# Altium PCB Node_Layout.PcbDoc
Units mil, origin at the board's own origin, x right, y up, seen from the top; angles counter-clockwise.
Board outline 6000 x 4000 mil, 2 copper layers (Top Layer, Bottom Layer); 103 components, 82 nets, 369 pads, 10 vias.
Unrouted connection lines stored in the file: 158.
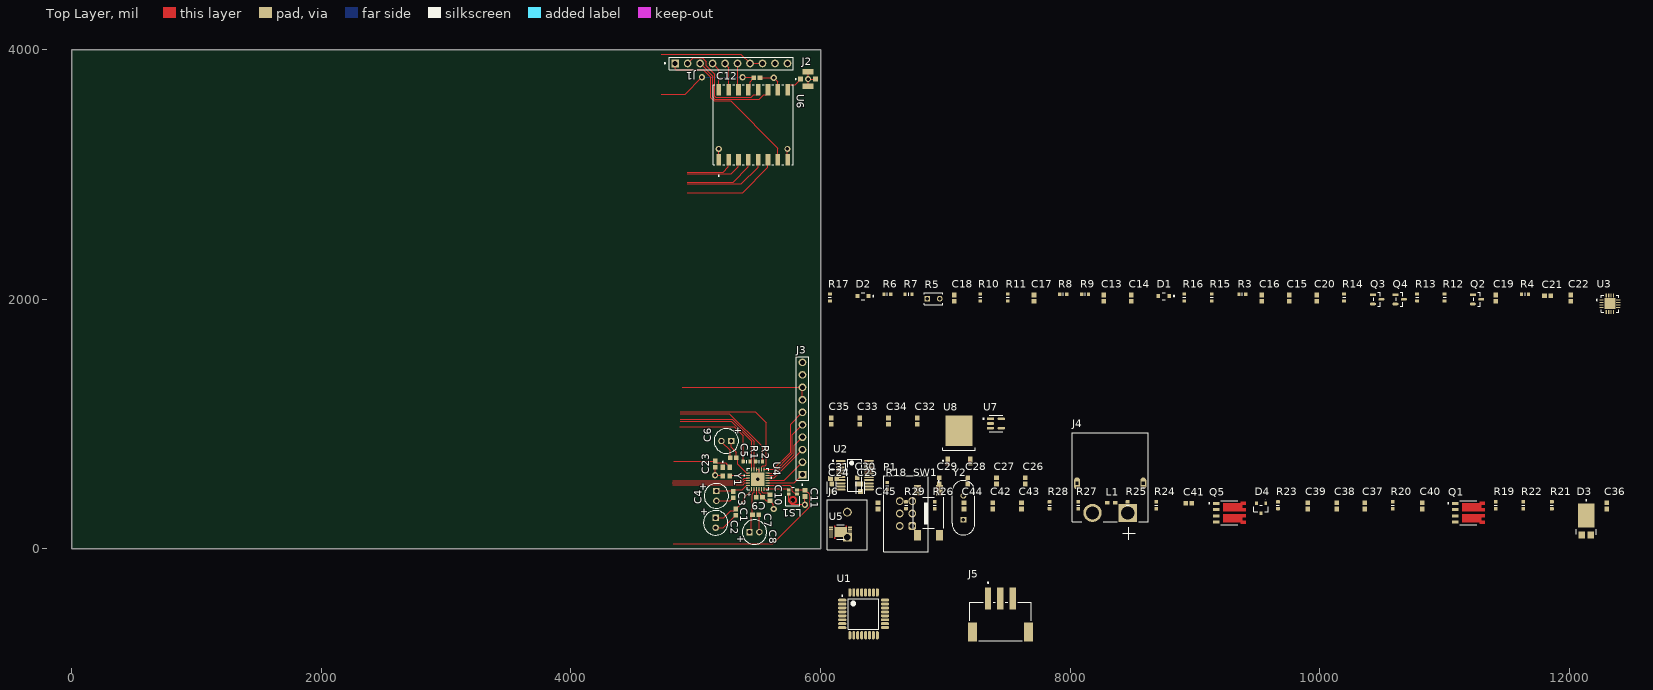
[diagram p0: Top Layer view]
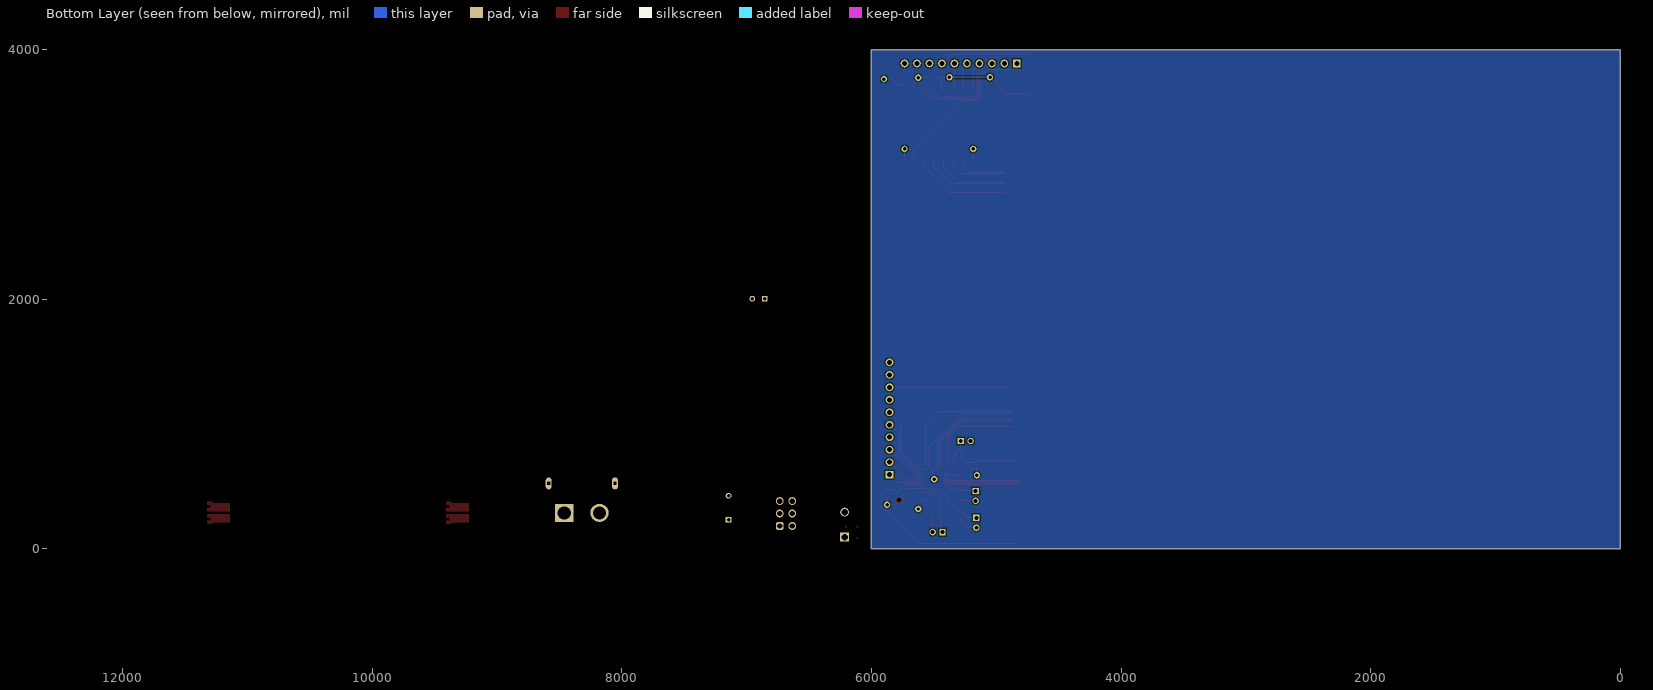
[diagram p1: Bottom Layer view, seen from below]

## Layer stack, top to bottom
Top Solder: solder mask 0.4, Solder Resist, Dk 3.5
Top Layer: signal copper 1.4
Dielectric 1: dielectric 12.6, FR-4, Dk 4.8
Bottom Layer: signal copper 1.4
Bottom Solder: solder mask 0.4, Solder Resist, Dk 3.5

## Board outline
0,0 6000,0 6000,4000 0,4000

## Design rules (kind name [scope] priority, off if disabled: settings)
Clearance [All] p1: gap=10 ignorepadtopadclearanceinfootprint=FALSE except(0: Arc-Hole Track-Hole SMDPad-Hole THPad-Hole Via-Hole Fill-Hole Poly-Hole Region-Hole Text-Hole; 5: Arc-Arc Arc-Track Track-Track SMDPad-SMDPad)
HoleSize [All] p1: absolutevalues=TRUE maxlimit=248.03 minlimit=11.81 maxpercent=80.000 minpercent=20.000
HoleToHoleClearance [All] p1: gap=19.68 allowstackedmicrovias=TRUE
PolygonConnect [All] p1: connectstyle=Relief reliefconductorwidth=10 reliefentries=4 polygonreliefangle="90 Angle" airgapwidth=10
RoutingVias [All] p1: holewidth=28 width=50 viastyle="Through Hole" minholewidth=28 minwidth=50 maxholewidth=28 maxwidth=50
SolderMaskExpansion [All] p1: expansion=4 istentingtop=FALSE
Width [All] p1: maxlimit=10 minlimit=5 preferedwidth=10 minimp=50.000000 maximp=50.000000 favimp=50.000000
28 further rules are at their usual default settings.

## Classes and differential pairs
component class Power: C13 C14 C15 C16 C17 C18 C19 C20 C21 C22 C32 C33 C34 C35 C36 C37 C38 C39 C40 C41 C42 C43 C44 C45 D1 D2 D3 D4 J4 J5 J6 L1 Q1 Q2 Q3 Q4 Q5 R3 R4 R5 R6 R7 R8 R9 R10 R11 R12 R13 R14 R15 R16 R17 R19 R20 R21 R22 R23 R24 R25 R26 R27 R28 R29 U3 U5 U7 U8
component class Mic: * C1 C2 C3 C4 C5 C6 C7 C8 C9 C10 C11 C23 J3 LS1 R1 R2 U4 Y1
component class LoRa: C12 J1 J2 U6
component class ATMEGA: C24 C25 C26 C27 C28 C29 C30 C31 P1 R18 SW1 U1 U2 Y2

## Components (designator, comment, footprint, x,y, rotation, side; value= is the part's Value field where it differs from the comment)
C1 "Capacitor 100 nF +/-10% 50 V 0603" CAPC1608X90X40NL10T20 5320,295 r270 top value=0.1uF
C2 "ECA-1HHG010" CAPPR55-200-1100X500X1200 5160,209.37 r270 top value=1µF
C3 "Capacitor 100 nF +/-10% 50 V 0603" CAPC1608X90X40NL10T20 5300,435 r270 top value=0.1uF
C4 "ECA-1HHG010" CAPPR55-200-1100X500X1200 5165,425 r270 top value=10µF
C5 "Capacitor 100 nF +/-10% 50 V 0603" CAPC1608X90X40NL10T20 5300,730 r180 top value=0.1uF
C6 "ECA-1HHG010" CAPPR55-200-1100X500X1200 5245,865 r180 top value=10µF
C7 "Capacitor 100 nF +/-10% 50 V 0603" CAPC1608X90X40NL10T20 5480,275 r0 top value=0.1uF
C8 "ECA-1HHG010" CAPPR55-200-1100X500X1200 5470,135 r0 top value=10µF
C9 "Capacitor 100 nF +/-10% 50 V 0603" CAPC1608X90X40NL10T20 5510,415 r0 top value=1uF
C10 "Capacitor 100 nF +/-10% 50 V 0603" CAPC1608X90X40NL10T20 5595,410 r270 top value=1uF
C11 "Capacitor 100 nF +/-10% 50 V 0603" CAPC1608X90X40NL10T20 5875,445 r270 top value=0.1uF
C12 "Capacitor 100 nF +/-10% 50 V 0603" CAPC1608X90X40NL10T20 5490,3775 r0 top value=10uF
C13 "Capacitor 100 nF +/-10% 50 V 0603" CAPC1608X90X40NL10T20 8270,2010 r90 top value=0.1uF
C14 "Capacitor 100 nF +/-10% 50 V 0603" CAPC1608X90X40NL10T20 8490,2010 r90 top value=0.1uF
C15 "Capacitor 100 nF +/-10% 50 V 0603" CAPC1608X90X40NL10T20 9755,2010 r90 top value=0.1uF
C16 "Capacitor 100 nF +/-10% 50 V 0603" CAPC1608X90X40NL10T20 9535,2010 r90 top value=1uF
C17 "Capacitor 100 nF +/-10% 50 V 0603" CAPC1608X90X40NL10T20 7710,2010 r90 top value=0.1uF
C18 "Capacitor 100 nF +/-10% 50 V 0603" CAPC1608X90X40NL10T20 7070,2010 r90 top value=2.2uF
C19 "Capacitor 100 nF +/-10% 50 V 0603" CAPC1608X90X40NL10T20 11410,2010 r90 top value=0.1uF
C20 "Capacitor 100 nF +/-10% 50 V 0603" CAPC1608X90X40NL10T20 9975,2010 r90 top value=0.1uF
C21 "Capacitor 100 nF +/-10% 50 V 0603" CAPC1608X90X40NL10T20 11825,2030 r0 top value=0.1uF
C22 "Capacitor 100 nF +/-10% 50 V 0603" CAPC1608X90X40NL10T20 12010,2010 r90 top value=0.1uF
C23 "Capacitor 100 nF +/-10% 50 V 0603" CAPC1608X90X40NL10T20 5155,680 r270 top value=0.1uF
C24 "C0603C220J5GACTU" FP-C0603C-CF-IPC_B 6090,490 r90 top value=22pF
C25 "C0603C220J5GACTU" FP-C0603C-CF-IPC_B 6320,490 r90 top value=22pF
C26 "Capacitor 100 nF +/-10% 50 V 0603" CAPC1608X90X40NL10T20 7640,545 r90 top value=0.1uF
C27 "Capacitor 100 nF +/-10% 50 V 0603" CAPC1608X90X40NL10T20 7410,545 r90 top value=0.1uF
C28 "Capacitor 100 nF +/-10% 50 V 0603" CAPC1608X90X40NL10T20 7180,545 r90 top value=0.1uF
C29 "Capacitor 100 nF +/-10% 50 V 0603" CAPC1608X90X40NL10T20 6950,545 r90 top value=0.1uF
C30 "Capacitor 100 nF +/-10% 50 V 0603" CAPC1608X90X40NL10T20 6295,545 r90 top value=0.1uF
C31 "Capacitor 100 nF +/-10% 50 V 0603" CAPC1608X90X40NL10T20 6105,565 r0 top value=0.1uF
C32 "Capacitor 100 nF +/-10% 50 V 0603" CAPC1608X90X40NL10T20 6775,1025 r90 top value=1uF
C33 "Capacitor 100 nF +/-10% 50 V 0603" CAPC1608X90X40NL10T20 6315,1025 r90 top value=0.33uF
C34 "Capacitor 100 nF +/-10% 50 V 0603" CAPC1608X90X40NL10T20 6545,1025 r90 top value=0.1uF
C35 "Capacitor 100 nF +/-10% 50 V 0603" CAPC1608X90X40NL10T20 6085,1025 r90 top value=1uF
C36 "Capacitor 100 nF +/-10% 50 V 0603" CAPC1608X90X40NL10T20 12300,345 r90 top value=?
C37 "Capacitor 100 nF +/-10% 50 V 0603" CAPC1608X90X40NL10T20 10360,345 r90 top value=?
C38 "Capacitor 100 nF +/-10% 50 V 0603" CAPC1608X90X40NL10T20 10135,345 r90 top value=?
C39 "Capacitor 100 nF +/-10% 50 V 0603" CAPC1608X90X40NL10T20 9905,345 r90 top value=?
C40 "Capacitor 100 nF +/-10% 50 V 0603" CAPC1608X90X40NL10T20 10820,345 r90 top value=?
C41 "Capacitor 100 nF +/-10% 50 V 0603" CAPC1608X90X40NL10T20 8950,365 r0 top value=?
C42 "Capacitor 100 nF +/-10% 50 V 0603" CAPC1608X90X40NL10T20 7380,345 r90 top value=?
C43 "Capacitor 100 nF +/-10% 50 V 0603" CAPC1608X90X40NL10T20 7610,345 r90 top value=?
C44 "Capacitor 100 nF +/-10% 50 V 0603" CAPC1608X90X40NL10T20 7150,345 r90 top value=?
C45 "Capacitor 100 nF +/-10% 50 V 0603" CAPC1608X90X40NL10T20 6460,345 r90 top value=?
D1 "MM3Z5V6C" FP-SOD-323F-MFG 8750,2025 r0 top
D2 "MM3Z5V6C" FP-SOD-323F-MFG 6340,2025 r0 top
D3 "PDS1040-13" FP-PowerDI5-MFG 12135,225 r90 top
D4 "BAT54C" NXP-SOT23-3_V 9530,325 r0 top
J1 "4-644456-0" FP-4-644456-0-MFG 5285,3890 r180 top
J2 "0734120114" MOLEX_0734120114 5900,3765 r270 top
J3 "4-644456-0" FP-4-644456-0-MFG 5855,1045 r270 top
J4 "XT60PW-M" AMASS_XT60PW-M 8320.75,525 r0 top
J5 "S3B-XH-SM4-TB(LF)(SN)" FP-S3B-XH-SM4-TB_LF_SN-MFG 7440.59,-580.35 r0 top
J6 "1729128" PHOE-1729128-2_V 6215,195 r90 top
L1 "BLM18AG121SN1D" MURA-BLM18-F-H1-CHIP-2_V 8330,370 r0 top
LS1 "SPH0641LU4H-1_L" SPH0655LM4H-1_KNO_L 5777.97,418.76 r90 top
P1 "61200621621" 61200621621 6885,-30 r90 top
Q1 "SI7288DP-T1-GE3" TRANS_SI7288DP-T1-GE3 11190,290 r0 top
Q2 "2N7002K" FP-318-08-IPC_C 11260,2000 r0 top
Q3 "2N7002K" FP-318-08-IPC_C 10460,2000 r0 top
Q4 "2N7002K" FP-318-08-IPC_C 10640,2000 r0 top
Q5 "SI7288DP-T1-GE3" TRANS_SI7288DP-T1-GE3 9275,290 r0 top
R1 "Resistor 120R +/-5 % 0603 0.1 W" RESC0603(1608)_L 5407.44,700 r180 top value=10k
R2 "Resistor 120R +/-5 % 0603 0.1 W" RESC0603(1608)_L 5507.44,700 r0 top value=10k
R3 "Resistor 120R +/-5 % 0603 0.1 W" RESC0603(1608)_L 9380,2040 r0 top value=100
R4 "Resistor 120R +/-5 % 0603 0.1 W" RESC0603(1608)_L 11645,2040 r0 top value=5
R5 "103AT-2" FP-103AT-2-MFG 6905,2005 r0 top value=10k
R6 "Resistor 120R +/-5 % 0603 0.1 W" RESC0603(1608)_L 6535,2040 r0 top value=100
R7 "Resistor 120R +/-5 % 0603 0.1 W" RESC0603(1608)_L 6705,2040 r0 top value=100
R8 "Resistor 120R +/-5 % 0603 0.1 W" RESC0603(1608)_L 7945,2040 r0 top value=100
R9 "Resistor 120R +/-5 % 0603 0.1 W" RESC0603(1608)_L 8120,2040 r0 top value=100
R10 "Resistor 120R +/-5 % 0603 0.1 W" RESC0603(1608)_L 7280,2015 r90 top value=100
R11 "Resistor 120R +/-5 % 0603 0.1 W" RESC0603(1608)_L 7500,2015 r90 top value=100
R12 "Resistor 120R +/-5 % 0603 0.1 W" RESC0603(1608)_L 11000,2015 r90 top value=10M
R13 "Resistor 120R +/-5 % 0603 0.1 W" RESC0603(1608)_L 10780,2015 r90 top value=10M
R14 "Resistor 120R +/-5 % 0603 0.1 W" RESC0603(1608)_L 10195,2015 r90 top value=10k
R15 "Resistor 120R +/-5 % 0603 0.1 W" RESC0603(1608)_L 9135,2015 r90 top value=5.1k
R16 "Resistor 120R +/-5 % 0603 0.1 W" RESC0603(1608)_L 8915,2015 r90 top value=5.1k
R17 "Resistor 120R +/-5 % 0603 0.1 W" RESC0603(1608)_L 6075,2015 r90 top value=10
R18 "Resistor 120R +/-5 % 0603 0.1 W" RESC0603(1608)_L 6535,505 r90 top value=10k
R19 "Resistor 120R +/-5 % 0603 0.1 W" RESC0603(1608)_L 11410,350 r90 top value=10k
R20 "Resistor 120R +/-5 % 0603 0.1 W" RESC0603(1608)_L 10585,350 r90 top value=10k
R21 "Resistor 120R +/-5 % 0603 0.1 W" RESC0603(1608)_L 11860,350 r90 top value=?
R22 "Resistor 120R +/-5 % 0603 0.1 W" RESC0603(1608)_L 11630,350 r90 top value=?
R23 "Resistor 120R +/-5 % 0603 0.1 W" RESC0603(1608)_L 9665,350 r90 top value=?
R24 "Resistor 120R +/-5 % 0603 0.1 W" RESC0603(1608)_L 8690,350 r90 top value=?
R25 "Resistor 120R +/-5 % 0603 0.1 W" RESC0603(1608)_L 8460,350 r90 top value=?
R26 "Resistor 120R +/-5 % 0603 0.1 W" RESC0603(1608)_L 6915,350 r90 top value=?
R27 "Resistor 120R +/-5 % 0603 0.1 W" RESC0603(1608)_L 8065,350 r90 top value=?
R28 "Resistor 120R +/-5 % 0603 0.1 W" RESC0603(1608)_L 7835,350 r90 top value=?
R29 "Resistor 120R +/-5 % 0603 0.1 W" RESC0603(1608)_L 6685,350 r90 top value=?
SW1 "FSM2JSMAA" FP-FSM2JSMAA-MFG 6865,290 r0 top
U1 "ATMEGA328P-AU" ATML-32A_M 6345,-520 r0 top
U2 "TXS0108EPWR" FP-PW0020A-IPC_A 6275,590 r0 top
U3 "BQ24650RVAT" FP-RVA0016A-IPC_B 12325,1965 r0 top
U4 "PCMD3180IRTWR" QFN_0IRTWR_TEX 5497.5,559.22 r90 top
U5 "BQ28Z620DRZR_L" VSON12_DRZ_TEX_L 6160,135 r0 top
U6 "RFM95W-915S2" IC16_RFM95W-915S2_RFS 5460.63,3398.5 r90 top
U7 "LP5907MFX-3.3/NOPB" FP-DBV0005A-IPC_B 7405,1005 r0 top
U8 "L7805CDT-TR" TO-252_L 7110,870 r90 top
Y1 "ECS-2033-120-BN" OSC_ECS-2033-120-BN 5245,620 r270 top
Y2 "HC-49US 16.000MHZ" JPY-HC-49US 7145,330 r90 top

## Footprints (in the part's own frame and the unit in brackets; to place one, negate y for a bottom-side part, rotate by r counter-clockwise, add the part's x,y. Pads: shape width x height; smd on the part's side, far side on the other; paste and mask are expansions set on the pad)
61200621621 [mm] "6 pins, straight, gold plating"
  rrect50% 1.6x1.6 hole 1.1: 1(5.425,3.81)
  round 1.6 hole 1.1: 2(5.425,6.35) 3(7.965,3.81) 4(7.965,6.35) 5(10.505,3.81) 6(10.505,6.35)
  silkscreen extent 0.23,0.58 15.71,9.58, body extent 0.33,0.65 15.6,9.83, height 9.13
AMASS_XT60PW-M [mm]
  rect 3.716x3.716 / inner round 3.716 / far side rect 3.716x3.716 hole 2.7: 1(3.6,-6)
  round 3.716 hole 2.7: 2(-3.6,-6)
  oval 1.2x2.4 hole 0.6 square: S1(6.75,0) S2(-6.75,0)
  silkscreen extent -7.75,-11.43 7.75,10.35, body extent -7.75,-7.85 7.75,10.35, height 8.4
ATML-32A_M [mm] "TQFP, 32-Leads, Body 7x7mm, Pitch 0.8mm, IPC Low Density"
  oval 1.7x0.6 smd: 1(-4.35,2.8) 2(-4.35,2) 3(-4.35,1.2) 4(-4.35,0.4) 5(-4.35,-0.4) 6(-4.35,-1.2) 7(-4.35,-2) 8(-4.35,-2.8) 17(4.35,-2.8) 18(4.35,-2) 19(4.35,-1.2) 20(4.35,-0.4) 21(4.35,0.4) 22(4.35,1.2) 23(4.35,2) 24(4.35,2.8)
  oval 0.6x1.7 smd: 9(-2.8,-4.35) 10(-2,-4.35) 11(-1.2,-4.35) 12(-0.4,-4.35) 13(0.4,-4.35) 14(1.2,-4.35) 15(2,-4.35) 16(2.8,-4.35) 25(2.8,4.35) 26(2,4.35) 27(1.2,4.35) 28(0.4,4.35) 29(-0.4,4.35) 30(-1.2,4.35) 31(-2,4.35) 32(-2.8,4.35)
  silkscreen extent -4.47,-3.1 3.1,3.77, body extent -4.5,-4.5 4.5,4.5, height 1.2
CAPC1608X90X40NL10T20 [mm] "Chip Capacitor, 2-Leads, Body 1.70x0.90mm, IPC Medium Density"
  rect 0.95x0.95 smd: 1(-0.625,0) 2(0.625,0)
  body extent -0.85,-0.45 0.85,0.45, height 0.9
CAPPR55-200-1100X500X1200 [mm] "THD, 2-Leads, Dia 5mm, Pin Spacing 2mm"
  rect 1.3x1.3 hole 0.8: 1(-1,0)
  round 1.3 hole 0.8: 2(1,0)
  silkscreen extent -2.5,-2.5 2.5,2.5, body extent -2.5,-2.5 2.45,2.5, height 12
FP-4-644456-0-MFG [mil]
  rect 61.65x61.65 hole 40 paste-99999 mask+0: 1(450,0)
  round 61.65 hole 40 paste-99999 mask+0: 2(350,0) 3(250,0) 4(150,0) 5(50,0) 6(-50,0) 7(-150,0) 8(-250,0) 9(-350,0) 10(-450,0)
  silkscreen extent -497,-49 537,49, body extent -500,-52 500,52, height 10
FP-103AT-2-MFG [mm]
  rect 1.15x1.15 hole 0.65 paste-2539.97 mask+0: 1(-1.27,0)
  round 1.15 hole 0.65 paste-2539.97 mask+0: 2(1.27,0)
  silkscreen extent -1.85,-1.2 1.85,1.2, body extent -1.95,-1.3 1.95,1.3, height 0.25
FP-318-08-IPC_C [mm]
  rect 1.224x0.538 smd paste+0 mask+0: 1(-0.86,0.95)
  rrect100% 1.224x0.538 smd paste+0 mask+0: 2(-0.86,-0.95) 3(0.86,0)
  silkscreen extent -0.65,-1.45 0.65,1.45, body extent -1.57,-1.55 1.57,1.55, height 0.25
FP-C0603C-CF-IPC_B [mil]
  rect 39.63x37.73 smd paste+0 mask+0: 1(-28.58,0) 2(28.58,0)
  silkscreen extent -48,-35 48,35, body extent -58,-29 58,29, height 10
FP-DBV0005A-IPC_B [mm]
  rect 1.505x0.572 smd paste+0 mask+0: 1(-1.1,0.95)
  rrect100% 1.505x0.572 smd paste+0 mask+0: 2(-1.1,0) 3(-1.1,-0.95) 4(1.1,-0.95) 5(1.1,0.95)
  silkscreen extent -2.65,-1.7 1.4,1.7, body extent -2.1,-1.7 2.1,1.7, height 0.25
FP-FSM2JSMAA-MFG [mm]
  rect 1.38x2.1 smd paste+0 mask+0: 1(2.25,4.55) 2(2.24,-4.55) 3(-2.24,4.55) 4(-2.24,-4.55)
  silkscreen extent -3.15,-3.15 3.15,6.5, body extent -3.25,-5.7 3.25,5.7, height 0.25
FP-PowerDI5-MFG [mm]
  rect 1.4x1.39 smd paste+0 mask+0: 1(-2.862,0.923) 3(-2.862,-0.917)
  rect 4.86x3.36 smd paste+0 mask+0: 2(1.12,0)
  silkscreen extent -2.73,-2.02 4.3,2.02, body extent -3.66,-2.12 3.65,2.12, height 0.25
FP-PW0020A-IPC_A [mm]
  rect 1.955x0.421 smd paste+0 mask+0: 1(-2.875,2.925)
  rrect100% 1.955x0.421 smd paste+0 mask+0: 2(-2.875,2.275) 3(-2.875,1.625) 4(-2.875,0.975) 5(-2.875,0.325) 6(-2.875,-0.325) 7(-2.875,-0.975) 8(-2.875,-1.625) 9(-2.875,-2.275) 10(-2.875,-2.925) 11(2.875,-2.925) 12(2.875,-2.275) 13(2.875,-1.625) 14(2.875,-0.975) 15(2.875,-0.325) 16(2.875,0.325) 17(2.875,0.975) 18(2.875,1.625) 19(2.875,2.275) 20(2.875,2.925)
  silkscreen extent -4.55,-3.25 1.4,3.25, body extent -4.35,-3.75 4.35,3.75, height 0.25
FP-RVA0016A-IPC_B [mm]
  rect 0.836x0.239 smd paste+0 mask+0: 1(-1.688,0.75)
  rrect100% 0.836x0.239 smd paste+0 mask+0: 2(-1.688,0.25) 3(-1.688,-0.25) 4(-1.688,-0.75) 9(1.688,-0.75) 10(1.688,-0.25) 11(1.688,0.25) 12(1.688,0.75)
  rrect100% 0.239x0.836 smd paste+0 mask+0: 5(-0.75,-1.688) 6(-0.25,-1.688) 7(0.25,-1.688) 8(0.75,-1.688) 13(0.75,1.688) 14(0.25,1.688) 15(-0.25,1.688) 16(-0.75,1.688)
  rect 2.24x2.24 smd paste-1000 mask+0: 17(0,0)
  silkscreen extent -2.78,-1.75 1.75,1.75, body extent -2.36,-2.36 2.36,2.36, height 0.25
FP-S3B-XH-SM4-TB_LF_SN-MFG [mm]
  rect 1.3x4.5 smd paste+0 mask+0: 1(-2.5,4.65) 2(0,4.65) 3(2.5,4.65)
  rect 1.8x3.9 smd paste+0 mask+0: 4(-5.7,-2.15) 5(5.7,-2.15)
  silkscreen extent -6.25,-3.9 6.25,8, body extent -6.7,-4.2 6.7,7, height 0.25
FP-SOD-323F-MFG [mm]
  rect 0.8x0.8 smd paste+0 mask+0: 1(-1.125,0) 2(1.125,0)
  silkscreen extent -0.35,-0.72 2.23,0.72, body extent -1.63,-0.82 1.63,0.82, height 0.25
IC16_RFM95W-915S2_RFS [mil]
  rect 91x37 smd paste+0 mask+0: 1(-281.5,275.59) 2(-281.5,196.85) 3(-281.5,118.11) 4(-281.5,39.37) 5(-281.5,-39.37) 6(-281.5,-118.11) 7(-281.5,-196.85) 8(-281.5,-275.59) 9(281.5,-275.59) 10(281.5,-196.85) 11(281.5,-118.11) 12(281.5,-39.37) 13(281.5,39.37) 14(281.5,118.11) 15(281.5,196.85) 16(281.5,275.59)
  silkscreen extent -412,-320 320,320, body extent -315,-315 315,315, height 71
JPY-HC-49US [mm] "THD, 2-Leads, Body 11.05x4.65mm, Pitch 4.9mm"
  rect 1.2x1.2 hole 0.7: 1(-2.45,0)
  round 1.2 hole 0.7: 2(2.45,0)
  silkscreen extent -5.53,-2.32 5.53,2.32, body extent -5.53,-2.33 5.52,2.32, height 3.5
MOLEX_0734120114 [mm]
  rect 1x1 smd: 1(0,-1.5) 3(0,1.5)
  rect 1.05x2.2 smd: 2(-1.475,0) 4(1.475,0)
  silkscreen extent -0.1,-2.6 0.1,-2.4
MURA-BLM18-F-H1-CHIP-2_V [mm] "Chip Ferrite Bead, 2-Leads, Body 1.6x0.8mm, Height 0.95mm, Flow"
  rect 0.95x0.7 smd: 1(-0.825,0) 2(0.825,0)
  body extent -0.87,-0.48 0.87,0.48, height 0.95
NXP-SOT23-3_V [mm] "SOT23, 3-Leads, Body 1.3x2.9mm, Pitch 0.95mm"
  rect 0.6x0.7 smd paste-0.05: 1(0.95,1) 2(-0.95,1) 3(0,-1)
  silkscreen extent -1.45,-0.65 1.45,1.79, body extent -1.45,-0.65 1.45,0.65, height 1.1
OSC_ECS-2033-120-BN [mm]
  rect 1.1x0.9 smd: 1(-0.9,-0.7) 2(0.9,-0.7) 3(0.9,0.7) 4(-0.9,0.7)
  silkscreen extent -2.08,-0.8 -1.88,-0.6
PHOE-1729128-2_V [mm] "Receptacle, 2-Leads, Body 8.1x10.16mm, Pitch 5.08mm"
  rect 1.8x1.8 hole 1.3: 1(-2.54,0)
  round 1.8 hole 1.3: 2(2.54,0)
  silkscreen extent -5.08,-4.05 5.08,4.05, body extent -5.65,-4.05 5.08,4.05, height 10.01
QFN_0IRTWR_TEX [mil]
  rect 32x8 smd paste+0 mask+0: 1(-77.5,49.23) 2(-77.5,29.53) 3(-77.5,9.85) 4(-77.5,-9.85) 5(-77.5,-29.53) 6(-77.5,-49.23) 13(77.5,-49.23) 14(77.5,-29.53) 15(77.5,-9.85) 16(77.5,9.85) 17(77.5,29.53) 18(77.5,49.23)
  rect 8x32 smd paste+0 mask+0: 7(-49.22,-77.5) 8(-29.53,-77.5) 9(-9.84,-77.5) 10(9.85,-77.5) 11(29.54,-77.5) 12(49.23,-77.5) 19(49.23,77.5) 20(29.54,77.5) 21(9.85,77.5) 22(-9.84,77.5) 23(-29.53,77.5) 24(-49.22,77.5)
  rect 110x110 smd paste-54.5 mask+0: 25(0,0)
  silkscreen extent -86,-114 86,114, body extent -81,-81 81,81, height 32
RESC0603(1608)_L [mm] "Chip Resistor, Body 1.6x0.8mm, IPC High Density"
  rrect25% 0.66x0.76 smd: 1(-0.7,0) 2(0.7,0)
  silkscreen extent 0,-0.3 0,0.3, body extent -0.8,-0.4 0.8,0.4, height 0.45
SPH0655LM4H-1_KNO_L [mil]
  rect 21x29 smd paste-14.5 mask-14.5: 1(53.6,32.97) 2(21.24,32.97) 4(21.24,-32.97) 5(53.6,-32.97)
  rect 2x2 smd paste-1 mask-1: 3(-54.06,0)
  round 32 / inner round 60 / far side round 32 hole 32 unplated paste-99999 mask-16: 6(-28.06,0)
  Top Layer region: -8.13,-1.74 3.82,-2.79 3.94,0 2.38,9.89 -2.17,18.81 -9.25,25.89 -18.17,30.43 -28.06,32 -37.94,30.43 -46.86,25.89 -53.94,18.81 -58.49,9.89 -60.06,0 -59.93,-2.79 -47.98,-1.74 -48.06,0 -47.08,6.18 -44.24,11.76 -39.81,16.18 -34.24,19.02 -28.06,20 -21.87,19.02 -16.3,16.18 -11.87,11.76 -9.03,6.18 -8.06,0
  Top Layer region: -8.13,1.74 3.82,2.79 3.94,0 2.38,-9.89 -2.17,-18.81 -9.25,-25.89 -18.17,-30.43 -28.06,-32 -37.94,-30.43 -46.86,-25.89 -53.94,-18.81 -58.49,-9.89 -60.06,0 -59.93,2.79 -47.98,1.74 -48.06,0 -47.08,-6.18 -44.24,-11.76 -39.81,-16.18 -34.24,-19.02 -28.06,-20 -21.87,-19.02 -16.3,-16.18 -11.87,-11.76 -9.03,-6.18 -8.06,0
  silkscreen extent -74,-57 74,57
TO-252_L [mm] "D-PAK, 4-Leads, Body 6.1x6.5mm, Pitch 2.28mm, Lead Span 9.7mm, IPC High Density"
  rect 1.8x0.9 smd: 1(-4.2,2.28) 3(-4.2,-2.28)
  rect 6.2x5.45 smd: 4(2,0)
  silkscreen extent -4.32,-3.3 -1.5,3.4, body extent -2.05,-3.3 4.15,3.3, height 2.4
TRANS_SI7288DP-T1-GE3 [mm]
  rect 1.27x0.61 smd: 1(-2.67,1.905) 2(-2.67,0.635) 3(-2.67,-0.635) 4(-2.67,-1.905)
  rect 0.1x0.1 smd paste-1 mask+0: 5_6_10(0.5,-1.1) 7_8_9(0.5,1.1)
  Top Layer region: 2.6,-0.33 3.305,-0.33 3.305,-0.94 2.6,-0.94 2.6,-1.6 3.305,-1.6 3.305,-2.21 2.285,-2.21 2.285,-1.955 -1.215,-1.955 -1.215,-0.305 2.6,-0.305
  Top Layer region: 3.305,1.6 2.6,1.6 2.6,0.94 3.305,0.94 3.305,0.33 2.6,0.33 2.6,0.305 -1.215,0.305 -1.215,1.955 2.285,1.955 2.285,2.21 3.305,2.21
  silkscreen extent -4.17,-2.45 1.72,2.45, body extent -3.07,-2.58 3.07,2.58, height 1.12
VSON12_DRZ_TEX_L [mil]
  rect 32x10 smd paste+0 mask+0: 1(-77.5,39.37) 2(-77.5,23.62) 3(-77.5,7.87) 4(-77.5,-7.87) 5(-77.5,-23.62) 6(-77.5,-39.37) 7(77.5,-39.37) 8(77.5,-23.62) 9(77.5,-7.87) 10(77.5,7.87) 11(77.5,23.62) 12(77.5,39.37)
  rect 100x81 smd paste+0 mask+0: 13(0,0)
  Top Layer region: 42,-40.5 50,-40.5 50,-52.5 42,-52.5
  Top Layer region: -42,-40.5 -50,-40.5 -50,-52.5 -42,-52.5
  Top Layer region: 42,40.5 50,40.5 50,52.5 42,52.5
  Top Layer region: -42,40.5 -50,40.5 -50,52.5 -42,52.5
  silkscreen extent -30,-57 30,57, body extent -81,-53 81,53, height 32

## Part data
C1 C3 C5 C7 C9 C10 C11 C12 C13 C14 C15 C16 C17 C18 C19 C20 C21 C22 C23 C26 C27 C28 C29 C30 C31 C32 C33 C34 C35 C36 C37 C38 C39 C40 C41 C42 C43 C44 C45: library part CMP-001-00017-6, "Chip Capacitor, 100 nF, +/- 10%, 50 V, 0603 (1608 Metric)", Capacitor Type=Ceramic, Case/Package=0603, Max Operating Temperature=125°C, Min Operating Temperature=-55°C, Tolerance=10%, Voltage Rating=50V, Mounting Technology=SM, Pins=2, RoHS Compliant=True
C2 C4 C6 C8: library part CMP-001-00024-7, "Aluminum Electrolytic Capacitor, 1 uF, +/- 20%, 50 V, -55 to 105 degC, 2-Pin THD, RoHS, Bulk", Capacitor Type=Electrolytic, Case/Package=Radial, Manufacturer=Panasonic, Max Operating Temperature=105°C, Min Operating Temperature=-55°C, Package Description="2-Pin Radial Lead, Dia 5 mm, Height 12 mm", Package Quantity=200, Package Reference=CAPPR55-200-1100X500X1200, Ripple Current=10mA, Tolerance=20%, Voltage Rating=50V, Datasheet URL=https://datasheet.ciiva.com/7275/94060-7275472.pdf, Datasheet Version=Mar-05, Diameter=5mm, Lead Pitch=2mm, Manufacturer URL=http://www.panasonic.com/, Mounting Technology=TH, Packaging=Bulk, Pins=2, Ripple Current (AC)=10mA, RoHS Compliant=True
C24 C25: library part CMP-001-00083-1, "Ceramic Capacitor, Multilayer, Ceramic, 50V, 5% +Tol, 5% -Tol, C0G, 30ppm/Cel TC, 0.000022uF, Surface Mount, 0603", Capacitor Type=Ceramic, Case/Package=0603, Max Operating Temperature=125°C, Min Operating Temperature=-55°C, Mounting Technology="Surface Mount", Pins=2, RoHS Compliant=Yes
D1 D2: library part CMP-004-00031-1, "Zener Diode, 5.6V V(Z), 5%, 0.2W, Silicon, Unidirectional", Max Operating Temperature=150°C, Pins=2, RoHS Compliant=Yes
D3: library part CMP-004-00033-1, "Rectifier Diode, Schottky, 1 Phase, 1 Element, 10A, 40V V(RRM), Silicon", Forward Voltage=410mV, Max Operating Temperature=180°C, Min Operating Temperature=-65°C, Pins=3, RoHS Compliant=Yes
D4: library part CMP-004-00032-1, "Rectifier Diode, Schottky, 2 Element, 0.2A, 30V V(RRM), Silicon, TO-236AB", Forward Voltage=1V, Max Operating Temperature=150°C, Min Operating Temperature=-55°C, Pins=3, RoHS Compliant=Yes
J1 J3: library part CMP-002-00072-1, "Board Connector, 10 Contact(s), 1 Row(s), Male, Straight, 0.1 inch Pitch, Solder Terminal, Natural Insulator, Plug", Max Operating Temperature=105°C, Min Operating Temperature=-55°C, Connector Type="BOARD CONNECTOR", Mounting Technology=Board, RoHS Compliant=Yes
J2: library part CMP-003-000000-1, "U.FL (UMCC) Connector Receptacle, Male Pin 50Ohm Surface Mount Solder", Package=None, Availability=Unavailable, Component Type=Standard, Design Item ID=0734120114, MF=Molex, MP=0734120114, Pin Count=4, Price=None, SnapEDA_Link=https://www.snapeda.com/parts/0734120114/Molex/view-part/557843/?ref=snap, Source=0734120114.SchLib
J4: library part CMP-002-00073-1, "Socket, DC supply, male, PIN: 2", Case/Package=Package, Availability="Not in stock", Check_prices=https://www.snapeda.com/parts/XT60PW-M/AMASS/view-part/?ref=eda, Component Type=Standard, Design Item ID=XT60PW-M, MF=AMASS, MP=XT60PW-M, Pins=2, Price=None, SnapEDA_Link=https://www.snapeda.com/parts/XT60PW-M/AMASS/view-part/?ref=snap, Source=XT60PW-M.SchLib
J5: library part CMP-002-00074-1, "Conn Shrouded Header HDR 3 POS 2.5mm Solder RA Side Entry SMD T/R"
J6: library part CMP-002-00076-1, "Barrier Strip Terminal Block, 13.5A, 1.5mm2, 1 Row(s), 1 Deck(s)", Voltage Rating=400V, Mounting Technology=Board, RoHS Compliant=Yes
L1: library part CMP-006-00004-3, "Chip Ferrite Bead for General Use, 120 Ohm, 500 mA, -55 to 125 degC, 0603 (1608 Metric), RoHS, Tape and Reel", Case/Package=0603, Current Rating=500mA, Manufacturer=Murata, Max Operating Temperature=125°C, Min Operating Temperature=-55°C, Package Quantity=4000, Package Reference=BLM18_H950-2, Resistance=200mohm, Tolerance=25%, Core Material=Ferrite, Datasheet URL=https://statics3.seeedstudio.com/images/opl/datasheet/303010016.pdf, Datasheet Version=Jun-12, Impedance=120Ohm, Max Current Rating=500mA, Packaging=TapeandReel, RoHS Compliant=True
LS1: library part CMP-00027-00004-1, "No Description Available", Manufacturer_Part_Number=SPH0641LU4H-1, Mfr_Name=Knowles, Copyright="Copyright (C) 2023 Ultra Librarian. All rights reserved.", Design Item ID=SPH0641LU4H-1_L, RefDes=RefDes, Source=SPH0641LU4H-1_L.SchLib, Type=DEV
P1: library part CMP-002-00075-1, "Board Connector, 6 Contact(s), 2 Row(s), Male, Straight, Solder Terminal", Connector Type="BOARD CONNECTOR", Mounting Technology=Board, RoHS Compliant=Yes
Q1 Q5: library part CMP-027-000000-1, "Mosfet Array 2 N-Channel (Dual) 40V 20A 15.6W Surface Mount PowerPAKÂ® SO-8 Dual", Package="SO-8 Vishay", Check_prices=https://www.snapeda.com/parts/SI7288DP-T1-GE3/Vishay+Siliconix/view-part/?ref=eda, Component Type=Standard, Design Item ID=SI7288DP-T1-GE3, Digi-Key_Part_Number=SI7288DP-T1-GE3TR-ND, MF=Vishay, MP=SI7288DP-T1-GE3, Pin Count=6, Purchase-URL=https://pricing.snapeda.com/search/part/SI7288DP-T1-GE3/?ref=eda, SnapEDA_Link=https://www.snapeda.com/parts/SI7288DP-T1-GE3/Vishay+Siliconix/view-part/?ref=snap, Source=SI7288DP-T1-GE3.SchLib
Q2 Q3 Q4: library part CMP-013-00035-1, "Small Signal Field-Effect Transistor, 0.115A I(D), 60V, 1-Element, N-Channel, Silicon, Metal-oxide Semiconductor FET, TO-236AB", RoHS Compliant=No
R1 R2 R3 R4 R6 R7 R8 R9 R10 R11 R12 R13 R14 R15 R16 R17 R18 R19 R20 R21 R22 R23 R24 R25 R26 R27 R28 R29: library part CMP-009-00176-3, "Chip Resistor, 120 Ohms, +/-5 %, 0.1 W, -55 to 155 degC, 0603", Case/Package=0603, Max Operating Temperature=155°C, Min Operating Temperature=-55°C, Power=100mW, Tolerance=5%, Pins=2
R5: library part CMP-009-00177-1, "NTC Thermistor, 10000ohm, Through Hole Mount", Max Operating Temperature=110°C, Min Operating Temperature=-50°C, Power=10mW, Tolerance=1%, Mounting Technology="Through Hole", Pins=2, RoHS Compliant=Yes
SW1: library part CMP-011-00013-1, "Keypad Switch, 1 Switches, SPST, Momentary-tactile, 0.05A, 24VDC, 3.04N, Solder Terminal, Surface Mount-straight", Max Operating Temperature=85°C, Min Operating Temperature=-20°C, Mounting Technology="Surface Mount", RoHS Compliant=Yes
U1: library part CMP-020-00003-3, "8-Bit Microcontroller with 32 KBytes In-System Programmable Flash, 23 I/Os, -40 to 85 degC, 32-Pin TQFP (32A), RoHS, Tray", Case/Package=TQFP, Clock Frequency=20MHz, Manufacturer=Atmel, Max Operating Temperature=85°C, Max Supply Voltage=5.5V, Min Operating Temperature=-40°C, Min Supply Voltage=1.8V, Package Description="32-Pin Thin Profile Plastic Quad Flat Package, Body 7 x 7 mm, Pitch 0.8 mm", Package Quantity=250, Package Reference=32A, ADC Channels=8, Datasheet URL=http://www.atmel.com/images/Atmel-8271-8-bit-AVR-Microcontroller-ATmega48A-48PA-88A-88PA-168A-168PA-328-328P_datasheet_Complete.pdf, Datasheet Version="Rev. 8271J, 11/2015", Density=32KB, Ethernet Channels=0, Frequency=20MHz, I/Os=23, Interface=USART, Manufacturer URL=http://www.atmel.com/, Max Clock Frequency=20MHz, Mounting Technology=SM, Packaging=Tray, Pins=32, PWM Channels=6, RAM Size=2KB, RoHS Compliant=True, USB Channels=0
U2: library part CMP-019-00054-1, "Interface Circuit, PDSO20", Case/Package=TSSOP, Max Operating Temperature=85°C, Max Supply Voltage=3.6V, Min Operating Temperature=-40°C, Min Supply Voltage=1.2V, Pins=20, RoHS Compliant=Yes
U3: library part CMP-019-00049-1, "Power Supply Support Circuit, Adjustable, 1 Channel, +3.85V, PQCC16", Case/Package=HVQCCN, Max Operating Temperature=85°C, Max Supply Voltage=28V, Min Operating Temperature=-40°C, Min Supply Voltage=5V, Pins=16, RoHS Compliant=Yes
U4: library part CMP-011-000000-1, "No Description Available", Mfr_Name="Texas Instruments", Copyright="Copyright (C) 2023 Ultra Librarian. All rights reserved.", Design Item ID=PCMD3180IRTWR, Manufacturer_Part_Number=PCMD3180IRTWR, RefDes=RefDes, Source=PCMD3180IRTWR.SchLib, Type=DEV
U5: library part CMP-00029-00001-1, "No Description Available", Manufacturer_Part_Number=BQ28Z620DRZR, Mfr_Name="Texas Instruments", Copyright="Copyright (C) 2023 Ultra Librarian. All rights reserved.", Design Item ID=BQ28Z620DRZR_L, RefDes=RefDes, Source=BQ28Z620DRZR.SchLib, Type=DEV
U6: library part CMP-00025-00004-1, "No Description Available", Mfr_Name="RF Solutions", Copyright="Copyright (C) 2023 Ultra Librarian. All rights reserved.", Design Item ID=RFM95W-915S2, Manufacturer_Part_Number=RFM95W-915S2, RefDes=RefDes, Source=RFM95W-915S2.SchLib, Type=DEV
U7: library part CMP-019-00051-1, "Fixed Positive LDO Regulator, 3.3V, 0.25V Dropout, PDSO5", Case/Package=LSSOP, Max Supply Voltage=5.5V, Pins=5, RoHS Compliant=Yes
U8: library part CMP-019-00050-1, "Fixed Positive Standard Regulator, 5VBIPolar, PSSO2", Max Supply Voltage=25V, Pins=2, RoHS Compliant=Yes
Y1: library part CMP-023-000000-1, "12MHz XO (Standard) CMOS Oscillator 3.3V Enable/Disable 4-SMD, No Lead", Package="SMD-4 ECS International", Arrow_Electronics-Purchase-URL=https://snapeda.com/shop?store=Arrow+Electronics&id=2724744, Availability=Good, Component Type=Standard, Design Item ID=ECS-2033-120-BN, DigiKey-Purchase-URL=https://snapeda.com/shop?store=DigiKey&id=2724744, MF="ECS Inc.", Mouser-Purchase-URL=https://snapeda.com/shop?store=Mouser&id=2724744, MP=ECS-2033-120-BN, Pin Count=4, Price=None, SnapEDA_Link=https://www.snapeda.com/parts/ECS-2033-120-BN/ECS%20Inc./view-part/2724744/?ref=snap, Source=ECS-2033-120-BN.SchLib
Y2: library part CMP-003-00005-2, "Crystal, 16 MHz, +/- 30 ppm, 18 pF, -20 to 70 degC, 2-Pin THD", Case/Package=HC-49US, Frequency=16MHz, Manufacturer="Jing peng yuan", Package Description="2-Pin Throug Hole Device, Body 11.05 x 4.65 mm, Pitch 4.9 mm", Datasheet URL=https://statics3.seeedstudio.com/images/opl/datasheet/306010014.pdf, Datasheet Version=May-15, Mounting Technology=TH, Package Reference=HC-49US, RoHS Compliant=Unknown

## Via types
v1: diameter 50, hole 28, Top Layer to Bottom Layer, 10 vias

## Nets (pads, with @x,y where several pads share a name; then routed paths per layer and width w, separated by ;. In a path a pad name is that pad's centre, name@x,y a point inside that pad or via, vN(x,y) a via of type N, cw(c..) or ccw(c..) an arc to the next point about the centre after c; other vN are vias at no path point)
+5: C27.1 C28.1 C29.1 C31.1 C32.1 C34.1 P1.2 R18.1 U1.4 U1.6 U1.18 U2.19 U7.1 U7.3 U8.3
ATMEGA_MISO: P1.1 U1.16
ATMEGA_MOSI: P1.4 U1.15
ATMEGA_RST: P1.5 R18.2 SW1.3 SW1.4 U1.29
ATMEGA_SCK: P1.3 U1.17
ATMEGA_XTAL1: U1.7 Y2.1
ATMEGA_XTAL2: U1.8 Y2.2
Batt+: C19.2 C33.1 C42.1 C43.1 C44.1 C45.2 R17.2 R27.1 R28.2 U3.9 U8.1
Batt-: C1.2 C2.2 C3.2 C4.2 C5.2 C6.2 C7.2 C8.2 C9.2 C10.2 C11.2 C12.2 C13.2 C14.2 C15.1 C18.1 C20.1 C23.2 C24.2 C25.2 C26.2 C27.2 C28.2 C29.2 C30.2 C31.2 C32.2 C33.2 C34.2 C35.2 C36.2 C37.2 C38.2 C39.2 C40.2 C42.2 C43.2 D1.2 D2.2 J1.9 J1.10 J2.2 J2.3 J2.4 J3.9 J3.10 J5.5 J6.2 LS1.2 LS1.3 P1.6 Q5.1 R5.1 R6.2 R7.2 R14.2 R24.1 R26.1 R29.1 SW1.1 SW1.2 U1.3 U1.5 U1.21 U2.11 U3.11 U3.17 U4.4 U4.15 U4.16 U4.25 U5.1 U6.1 U6.8 U6.10 U7.2 U8.4 Y1.2 | length 1967.1
  Top Layer w10: C23.2 v1(5155,590) 5212.01,590 Y1.2 ; C2.2 5160.98,170.98 5220.59,170.98 C1.2 ; C4.2 5275.24,385.63 C3.2 ; v1(5185,3205) U6.1 U6.1 ; C6.2 5205.63,859.37 5275.39,789.61 C5.2 ; U4.16 U4.15 5507.35,569.07 v1(5497.5,559.22) U4.25@5507.35,549.38 ; C7.2 5509.37,270.24 C8.2 ; U4.4 5508.03,481.04 5508.03,450.97 5520.91,438.1 5520.91,428.7 C9.2 5564.21,385.39 C10.2 5622.84,357.55 5622.84,322.16 v1(5625,320) ; C12.2 5517.11,3772.5 5519.61,3775 v1@5626.32,3775 ; v1(5625,3775) v1@5626.32,3775 ; U6.10 5657.48,3743.84 v1@5626.32,3775 ; v1(5735,3205) 5735,3118.22 U6.8 ; LS1.2 5745,379.84 5765.13,359.71 5870.29,359.71 v1(5875,355) C11.2 ; J2.4 v1(5900,3765) ; J2.2 v1(5900,3765) ; J2.3 v1(5900,3765)
Batt_Cell1: R3.1
Batt_Cell2: C22.2 Q4.2 R4.1 R13.1
BMS_SCL: R9.2
BMS_SDA: R11.2
BMS_VC1: U5.12
BMS_VC2: C16.1 R4.2 U5.11
BQ2_CHG: R16.2 U5.9
BQ2_DSG: R15.2 U5.7
BQ2_SCL: R8.1 U5.5
BQ2_SDA: R10.1 U5.6
BQ2_TS1: R5.2 U5.4
LoRa_Antenna: J2.1 U6.9 | length 155.7
  Top Layer w10: U6.9 5736.22,3707 5749.72,3720.5 5796.44,3720.5 J2.1
LoRa_MISO: U6.2 | length 405.1
  Top Layer w10: 4930,3020 5220,3020 5262.36,3062.36 5262.36,3115.58 U6.2
LoRa_MOSI: U6.3 | length 490.8
  Top Layer w10: 4930,3005 5285,3005 5342.36,3062.36 5342.36,3116.84 U6.3
LoRa_NSS: U6.5 | length 682.9
  Top Layer w10: 4930,2925 5365,2925 5500,3060 U6.5
LoRa_RST: U6.6 | length 791.4
  Top Layer w10: 4930,2855 5375,2855 5578.74,3058.74 U6.6
LoRa_SCK: U6.4 | length 597.2
  Top Layer w10: 4930,2940 5300,2940 5421.26,3061.26 U6.4
MIC_CLK: LS1.4 U4.7 | length 280.5
  Top Layer w10: U4.7 5753.58,510 5774.5,489.08 5774.5,462.59 5791.59,445.5 5805.44,445.5 LS1.4
MIC_SIG: LS1.1 U4.6 | length 202.2
  Top Layer w10: U4.6 5731.64,481.72 5741,472.36 LS1.1
MPPT_BTST: C41.1 D4.1 U3.16
MPPT_HIDRV: Q1.2 U3.15
MPPT_LODRV: Q5.2 U3.13
MPPT_MPPSET: R25.1 R26.2 U3.2
MPPT_PH: C41.2 L1.1 Q1.1 Q5.7_8_9 U3.14
MPPT_REGN: C40.1 D4.2 U3.12
MPPT_SRP: C45.1 L1.2 R27.2 U3.10
MPPT_STAT1: R19.1 U3.3
MPPT_STAT2: R20.1 U3.5
MPPT_TS: R23.1 R24.2 U3.4
MPPT_VFB: C44.2 R28.1 R29.2 U3.8
NetC7_1: C7.1 C8.1 U4.2 | length 366.2
  Top Layer w10: C8.1 5445,149.37 5445,264.61 C7.1 5451.69,278.7 5451.69,439.91 5460.48,448.7 5462.11,448.7 5467.97,454.56 U4.2
NetC9_1: C9.1 U4.3 | length 67.7
  Top Layer w10: C9.1 5487.65,417.26 U4.3
NetC10_1: C10.1 U4.5 | length 88.8
  Top Layer w10: U4.5@5527.73,470.72 5527.73,459.51 5536.51,450.72 5578.88,450.72 C10.1
NetC13_1: C13.1 C17.1 U5.3
NetC14_1: C14.1 C17.2 U5.2
NetC16_2: C16.2 R3.2
NetC18_2: C18.2 U5.10
NetC19_1: C19.1 C20.2
NetC21_2: C21.2 C22.1
NetC26_1: C26.1 U1.20
NetC37_1: C37.1 R22.1 U3.1
NetC38_1: C38.1 R21.1
NetC39_1: C39.1 R23.2 U3.6 U3.7
NetD1_1: D1.1 R8.2 R9.1
NetD2_1: D2.1 R10.2 R11.1
NetQ2_1: Q2.1 R14.1
NetQ2_3: Q2.3 Q3.1 R12.2 R15.1
NetQ3_3: Q3.3 Q4.3
NetQ4_1: Q4.1 R13.2
NetR17_1: R17.1 U5.8
PCMD_BCLK: U4.22 | length 616
  Top Layer w10: 4812.01,530 5372.66,530 5392.04,549.38 U4.22
PCMD_CLK_IN: U4.20 Y1.3 | length 149.2
  Top Layer w10: Y1.3 5276.75,588.76 U4.20
PCMD_DREG: C1.1 C2.1 C3.1 C4.1 C11.1 C12.1 C23.1 C30.1 C35.1 J1.7 J1.8 J3.7 J3.8 LS1.5 R1.2 R2.2 U2.2 U4.1 U4.24 U6.13 U7.4 Y1.4 | length 7042.6
  Top Layer w10: 4725,3645 4915,3645 v1(5050,3780) ; 4725,3965 5360,3965 J1.7 J1.8 ; 4820,40 5616.57,40 5915,338.43 5915,439.01 5898.1,455.91 5888.7,455.91 5872.24,472.36 LS1.5 ; 4824.61,704.61 C23.1 5167.52,692.09 5241.37,692.09 5250.16,683.3 5250.16,677.94 5256.02,672.09 5259.84,672.09 5272.56,659.37 Y1.4 ; 4873.7,978.7 5309.52,978.7 5379.88,908.34 R1.2 ; 4875,1085 5266.86,1085 5535,816.86 R2.2 ; 4890,1295 J3.8 J3.7 ; C2.1 5160.63,249.37 5225.18,249.37 5281.71,305.91 5306.3,305.91 C1.1 5390.49,390.09 5390.49,413.94 5448.27,471.72 U4.1 ; C4.1 5295.24,464.37 C3.1 5313.7,473.31 5373.31,473.31 5410,510 U4.24 ; v1(5375,3780) 5460.39,3780 C12.1 5434.76,3744.37 5434.76,3693.5 U6.13
  Bottom Layer w10: v1(5050,3780) v1(5375,3780)
PCMD_FSYNC: U4.23 | length 610.6
  Top Layer w10: 4815.48,515 5378.88,515 5393.57,529.69 U4.23
PCMD_GPI2: J3.1 U4.8 | length 307.1
  Top Layer w10: U4.8 5789.69,529.69 J3.1
PCMD_GPI3: J3.3 U4.10 | length 373.6
  Top Layer w10: U4.10 5629.07,569.07 J3.3
PCMD_GPI4: J3.5 U4.12 | length 528
  Top Layer w10: U4.12 5618.45,608.45 5775,765 5775,915 J3.5
PCMD_GPO2: J3.2 U4.9 | length 340.3
  Top Layer w10: U4.9 5709.38,549.38 J3.2
PCMD_GPO3: J3.4 U4.11 | length 450.8
  Top Layer w10: U4.11 5623.76,588.76 5790,755 5790,830 J3.4
PCMD_GPO4: J3.6 U4.13 | length 629.9
  Top Layer w10: U4.13 5621.73,636.72 5760,775 5760,1000 J3.6
PCMD_IOVDD: C5.1 C6.1 U4.19 | length 318.6
  Top Layer w10: C6.1 5284.37,814.17 5324.61,773.94 C5.1 5338.31,716.3 5338.31,680.14 5410,608.45 U4.19
PCMD_SCL: R2.1 U4.17 | length 892.4
  Top Layer w10: 4875,1040 5290.65,1040 5467.97,862.68 U4.17
PCMD_SDA: R1.1 U4.18 | length 865.6
  Top Layer w10: 4875,1025 5284.43,1025 5448.27,861.16 U4.18
PCMD_SDOUT: U4.21 | length 616.2
  Top Layer w10: 4813.78,545 5366.45,545 5389.83,568.38 5419.31,568.38 U4.21
PCMD_SHDNZ: U4.14 | length 1126.7
  Top Layer w10: 4875,1100 5475,1100 5563,1012 5563,673.58 5557.14,667.72 5536.51,667.72 5527.03,658.25 U4.14
RFM_DIO0: J1.6 U6.14 | length 213.1
  Top Layer w10: J1.6 5335,3687.52 U6.14
RFM_DIO1: J1.5 U6.15 | length 221.9
  Top Layer w10: J1.5 5235,3882.75 5263.78,3853.97 U6.15
RFM_DIO2: J1.4 U6.16 | length 230.7
  Top Layer w10: J1.4 5185.04,3839.96 U6.16
RFM_DIO3: J1.3 U6.11 | length 806.6
  Top Layer w10: J1.3 5136.54,3788.46 5136.54,3622.07 5154.11,3604.5 5509.71,3604.5 5544.71,3639.5 5565.24,3639.5 5578.74,3653 U6.11
RFM_DIO4: J1.2 U6.12 | length 878.9
  Top Layer w10: J1.2 4980.83,3935.83 5053.98,3935.83 5085,3904.81 5085,3870 5151.54,3803.46 5151.54,3628.29 5160.33,3619.5 5445.97,3619.5 5465.97,3639.5 5486.5,3639.5 5500,3653 U6.12
RFM_DIO5: J1.1 U6.7 | length 1319.2
  Top Layer w10: J1.1 4835,3845.86 4840.86,3840 5059.14,3840 5121.54,3777.6 5121.54,3615.86 5147.9,3589.5 5280.5,3589.5 5657.48,3212.52 U6.7
Solar+: D3.2 J6.1 R19.2 R20.2 R21.2 R25.2
Solar_diode: D3.1 Q1.7_8_9 R22.2
pads on no net: C15.2 C21.1 C24.1 C25.1 C36.1 D3.3 D4.3 J4.1 J4.2 J4.S1 J4.S2 J5.1 J5.2 J5.3 J5.4 LS1.6 Q1.3 Q1.4 Q1.5_6_10 Q2.2 Q3.2 Q5.3 Q5.4 Q5.5_6_10 R6.1 R7.1 R12.1 R16.1 U1.1 U1.2 U1.9 U1.10 U1.11 U1.12 U1.13 U1.14 U1.19 U1.22 U1.23 U1.24 U1.25 U1.26 U1.27 U1.28 U1.30 U1.31 U1.32 U2.1 U2.3 U2.4 U2.5 U2.6 U2.7 U2.8 U2.9 U2.10 U2.12 U2.13 U2.14 U2.15 U2.16 U2.17 U2.18 U2.20 U5.13 U7.5 Y1.1

## Polygon pours and split planes (outlines as drawn)
Batt- on Bottom Layer "Batt-_L01_P001" (solid, pour order 2): 0,0 6000,0 6000,4000 0,4000

## Text inside footprints (layer, text, board x,y; h text height)
C2: Top Overlay "+" at 5045,330 h59.06 r270
C4: Top Overlay "+" at 5035,529.37 h59.06 r270
C6: Top Overlay "+" at 5374.37,970 h59.06 r180
C8: Top Overlay "+" at 5325,55 h59.06
L1: Mechanical 6 "Land Pattern Adapted for Flow Soldering" at 8290.63,393.62 h1.97
U4: Top Overlay "*" at 5460,420 h50 r90; Top 3D Body "*" at 5463.43,485.22 h50 r90